# Altium PCB USBtoRS232-Panel_3x3.PcbDoc
Units mm, origin at the board's own origin, x right, y up, seen from the top; angles counter-clockwise.
Board outline 108 x 87 mm, 2 copper layers (Top Layer, Bottom Layer), stack 0.77 mm thick; 3 components, 0 nets, 6 pads, 0 vias.
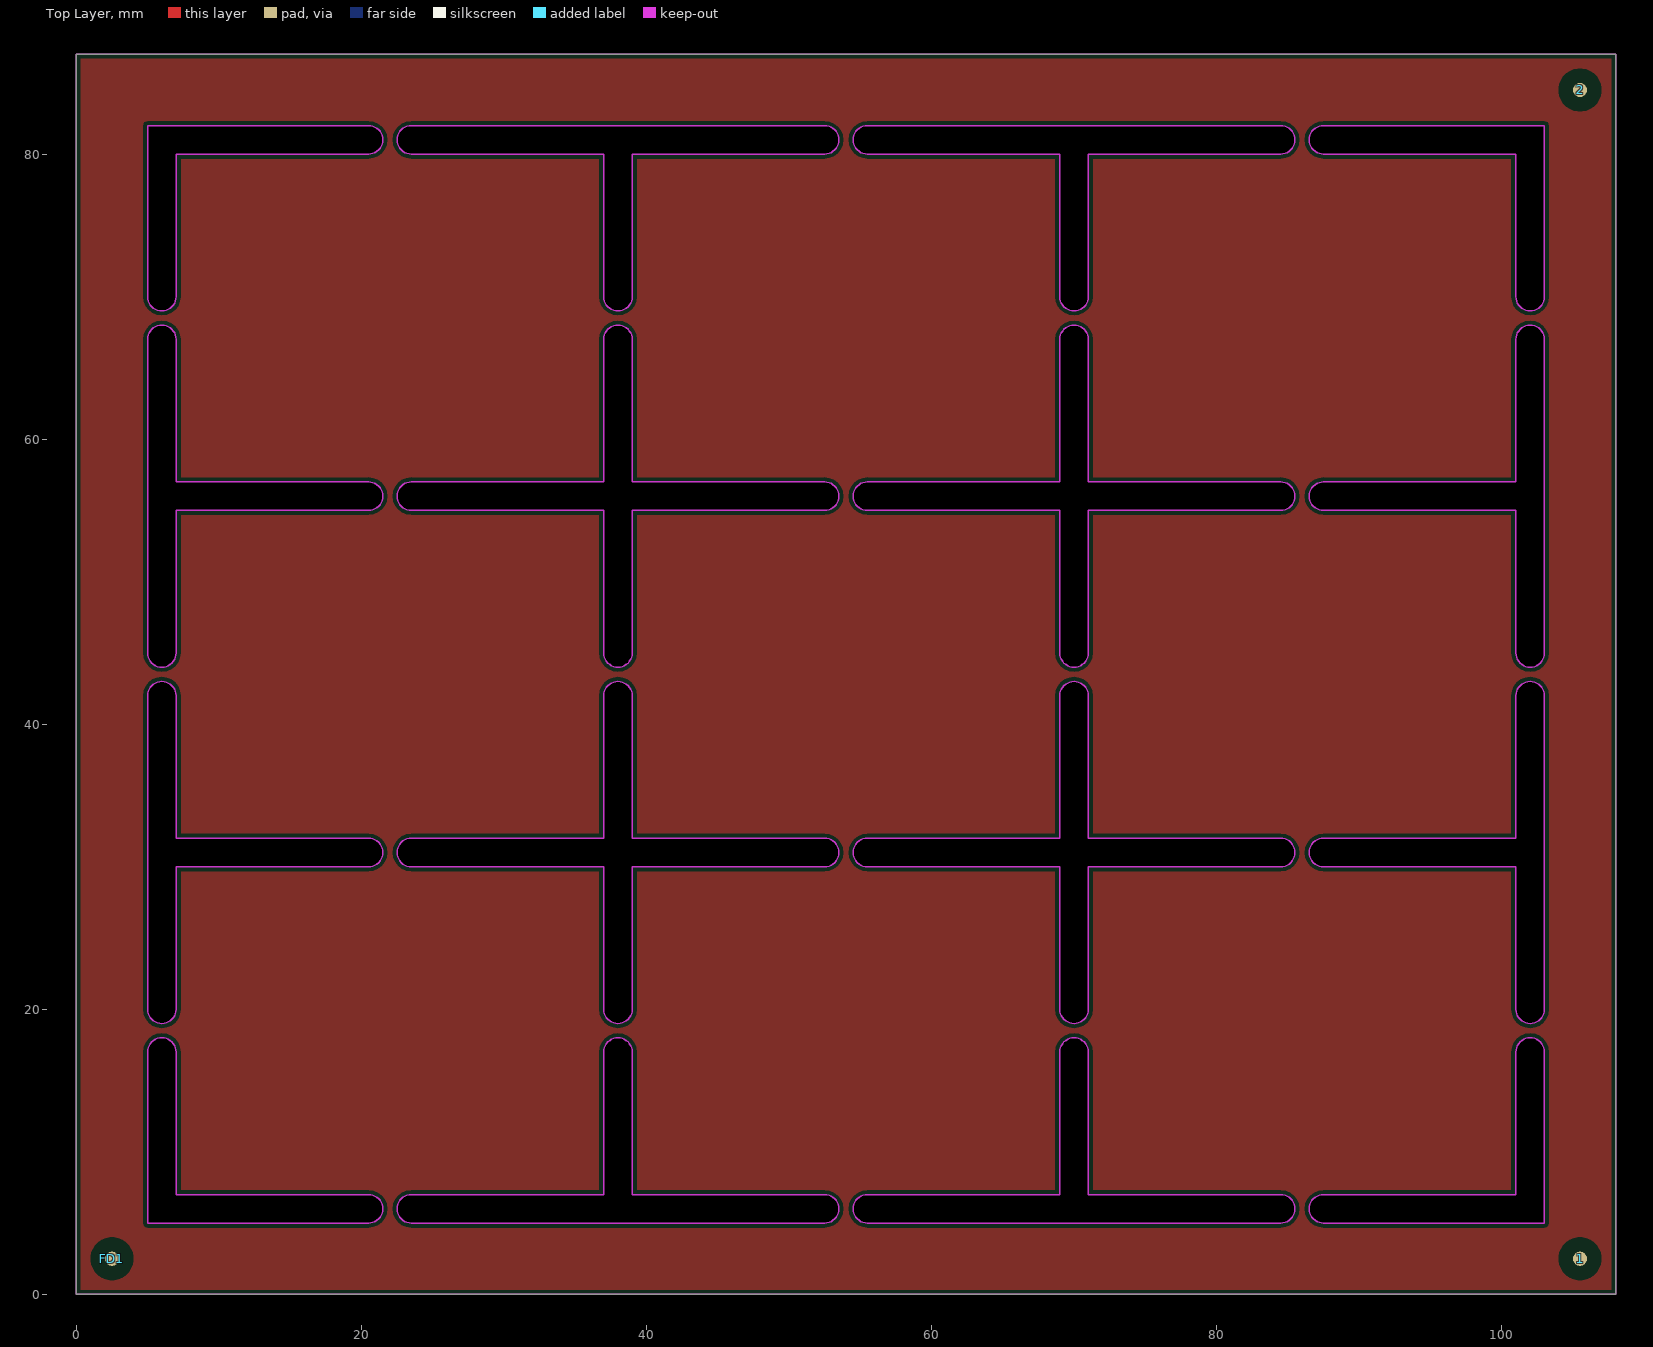
[diagram p0: Top Layer view]
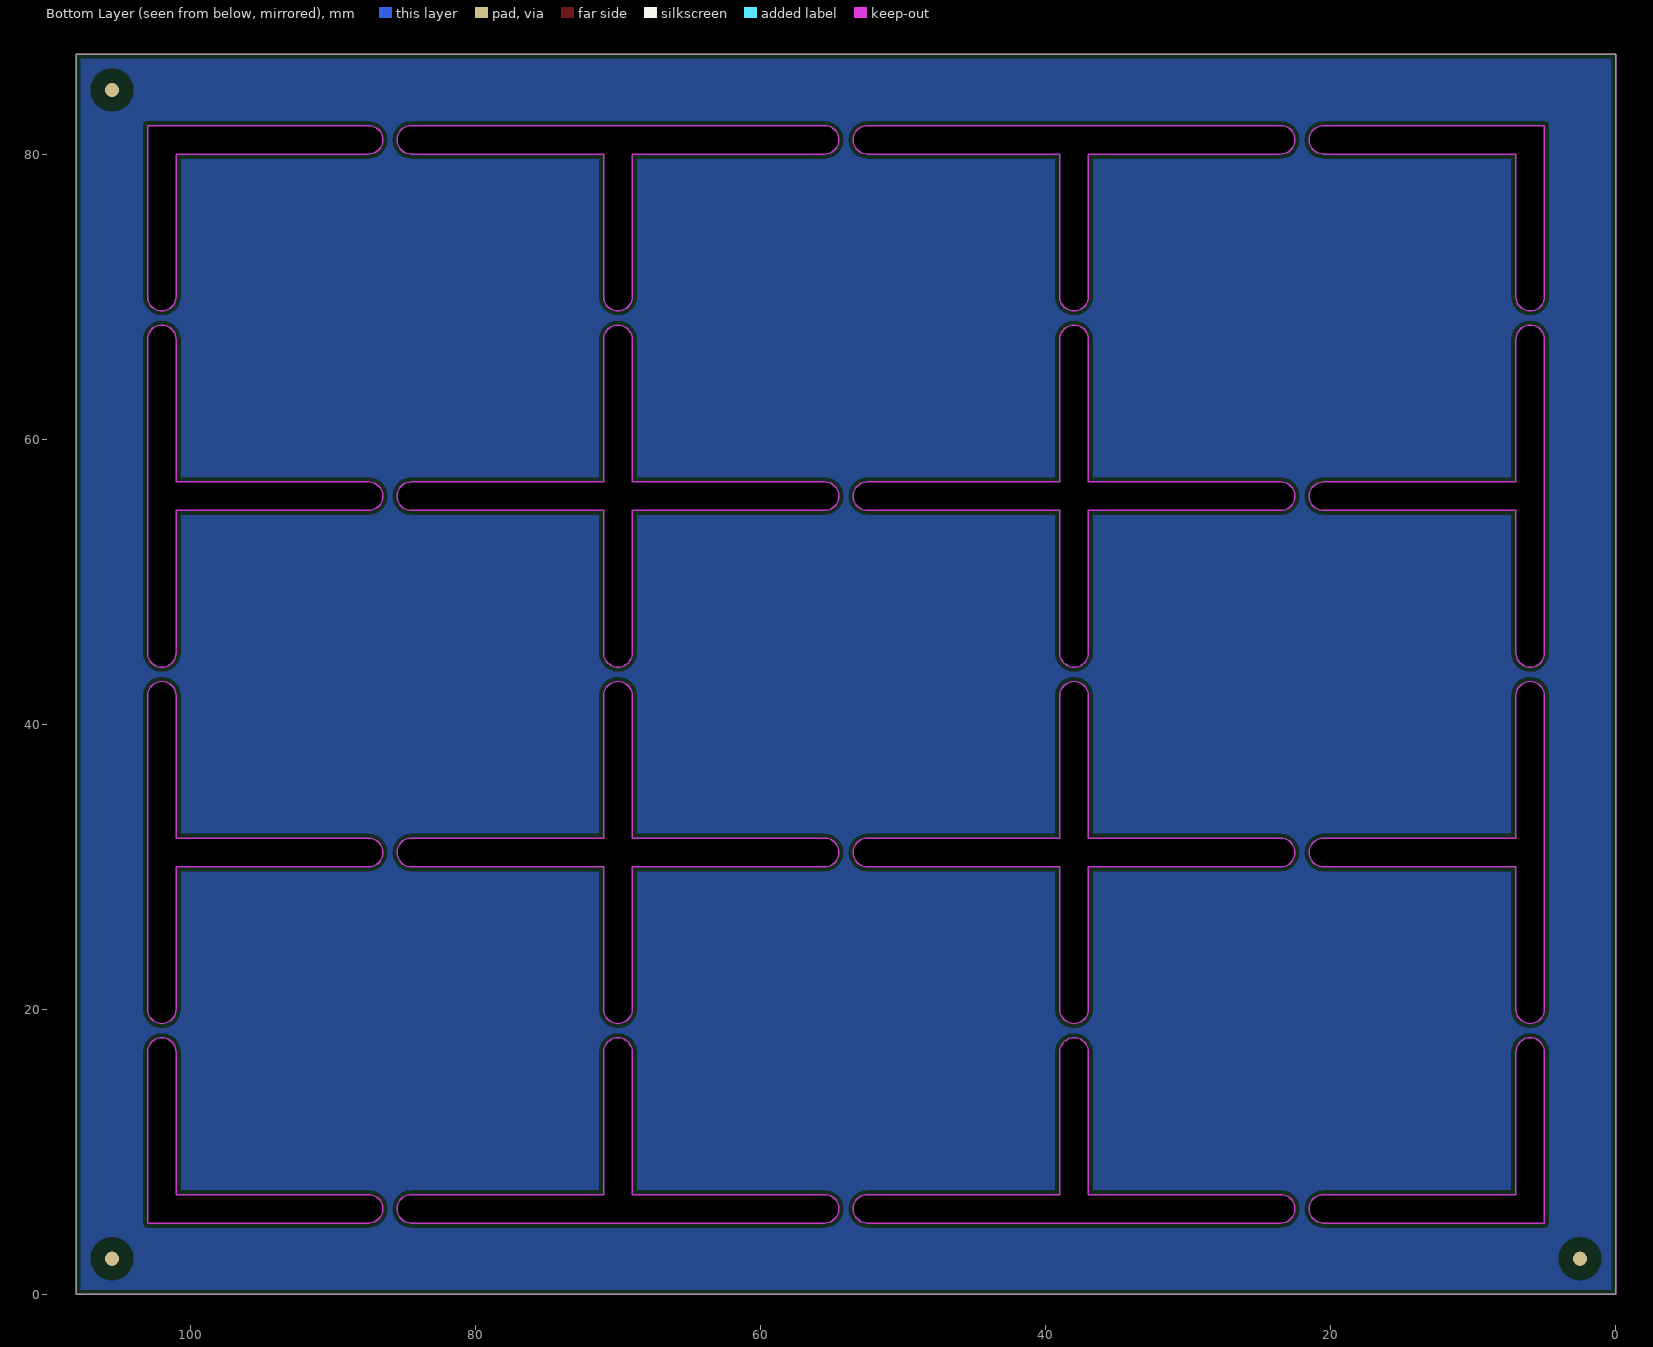
[diagram p1: Bottom Layer view, seen from below]

## Layer stack, top to bottom
Top Solder: solder mask 0.0102, Solder Resist, Dk 3.5
Top Layer: signal copper 0.035
Dielectric 1: dielectric 0.7, FR-4, Dk 4.8
Bottom Layer: signal copper 0.035
Bottom Solder: solder mask 0.0102, Solder Resist, Dk 3.5

## Board outline
0,0 0,87 108,87 108,0
cut-out: 103,5 103,17 ccw(c102,17) 102,18 ccw(c102,17) 101,17 101,7 87.5,7 ccw(c87.5,6) 86.5,6 ccw(c87.5,6) 87.5,5
cut-out: 102,19 ccw(c102,20) 103,20 103,42 ccw(c102,42) 102,43 ccw(c102,42) 101,42 101,32 87.5,32 ccw(c87.5,31) 86.5,31 ccw(c87.5,31) 87.5,30 101,30 101,20 ccw(c102,20)
cut-out: 102,44 ccw(c102,45) 103,45 103,67 ccw(c102,67) 102,68 ccw(c102,67) 101,67 101,57 87.5,57 ccw(c87.5,56) 86.5,56 ccw(c87.5,56) 87.5,55 101,55 101,45 ccw(c102,45)
cut-out: 102,69 ccw(c102,70) 103,70 103,82 87.5,82 ccw(c87.5,81) 86.5,81 ccw(c87.5,81) 87.5,80 101,80 101,70 ccw(c102,70)
cut-out: 84.5,80 71,80 71,70 cw(c70,70) 70,69 cw(c70,70) 69,70 69,80 55.5,80 cw(c55.5,81) 54.5,81 cw(c55.5,81) 55.5,82 84.5,82 cw(c84.5,81) 85.5,81 cw(c84.5,81)
cut-out: 84.5,55 71,55 71,45 cw(c70,45) 70,44 cw(c70,45) 69,45 69,55 55.5,55 cw(c55.5,56) 54.5,56 cw(c55.5,56) 55.5,57 69,57 69,67 cw(c70,67) 70,68 cw(c70,67) 71,67 71,57 84.5,57 cw(c84.5,56) 85.5,56 cw(c84.5,56)
cut-out: 84.5,30 71,30 71,20 cw(c70,20) 70,19 cw(c70,20) 69,20 69,30 55.5,30 cw(c55.5,31) 54.5,31 cw(c55.5,31) 55.5,32 69,32 69,42 cw(c70,42) 70,43 cw(c70,42) 71,42 71,32 84.5,32 cw(c84.5,31) 85.5,31 cw(c84.5,31)
cut-out: 85.5,6 ccw(c84.5,6) 84.5,7 71,7 71,17 ccw(c70,17) 70,18 ccw(c70,17) 69,17 69,7 55.5,7 ccw(c55.5,6) 54.5,6 ccw(c55.5,6) 55.5,5 84.5,5 ccw(c84.5,6)
cut-out: 22.5,6 cw(c23.5,6) 23.5,7 37,7 37,17 cw(c38,17) 38,18 cw(c38,17) 39,17 39,7 52.5,7 cw(c52.5,6) 53.5,6 cw(c52.5,6) 52.5,5 23.5,5 cw(c23.5,6)
cut-out: 23.5,30 37,30 37,20 ccw(c38,20) 38,19 ccw(c38,20) 39,20 39,30 52.5,30 ccw(c52.5,31) 53.5,31 ccw(c52.5,31) 52.5,32 39,32 39,42 ccw(c38,42) 38,43 ccw(c38,42) 37,42 37,32 23.5,32 ccw(c23.5,31) 22.5,31 ccw(c23.5,31)
cut-out: 23.5,55 37,55 37,45 ccw(c38,45) 38,44 ccw(c38,45) 39,45 39,55 52.5,55 ccw(c52.5,56) 53.5,56 ccw(c52.5,56) 52.5,57 39,57 39,67 ccw(c38,67) 38,68 ccw(c38,67) 37,67 37,57 23.5,57 ccw(c23.5,56) 22.5,56 ccw(c23.5,56)
cut-out: 23.5,80 37,80 37,70 ccw(c38,70) 38,69 ccw(c38,70) 39,70 39,80 52.5,80 ccw(c52.5,81) 53.5,81 ccw(c52.5,81) 52.5,82 23.5,82 ccw(c23.5,81) 22.5,81 ccw(c23.5,81)
cut-out: 6,69 cw(c6,70) 5,70 5,82 20.5,82 cw(c20.5,81) 21.5,81 cw(c20.5,81) 20.5,80 7,80 7,70 cw(c6,70)
cut-out: 6,44 cw(c6,45) 5,45 5,67 cw(c6,67) 6,68 cw(c6,67) 7,67 7,57 20.5,57 cw(c20.5,56) 21.5,56 cw(c20.5,56) 20.5,55 7,55 7,45 cw(c6,45)
cut-out: 6,19 cw(c6,20) 5,20 5,42 cw(c6,42) 6,43 cw(c6,42) 7,42 7,32 20.5,32 cw(c20.5,31) 21.5,31 cw(c20.5,31) 20.5,30 7,30 7,20 cw(c6,20)
cut-out: 5,5 5,17 cw(c6,17) 6,18 cw(c6,17) 7,17 7,7 20.5,7 cw(c20.5,6) 21.5,6 cw(c20.5,6) 20.5,5

## Design rules (kind name [scope] priority, off if disabled: settings)
Clearance [All] p1: gap=0.254 ignorepadtopadclearanceinfootprint=FALSE except(0: Arc-Hole Track-Hole SMDPad-Hole THPad-Hole Via-Hole Fill-Hole Poly-Hole Region-Hole Text-Hole)
PolygonConnect [All] p1: connectstyle=Relief reliefconductorwidth=0.254 reliefentries=4 polygonreliefangle="90 Angle" airgapwidth=0.254
RoutingVias [All] p1: holewidth=0.711 width=1.27 viastyle="Through Hole" minholewidth=0.711 minwidth=1.27 maxholewidth=0.711 maxwidth=1.27
SolderMaskExpansion [All] p1: expansion=0.102
Width [All] p1: maxlimit=0.254 minlimit=0.254 preferedwidth=0.254
30 further rules are at their usual default settings.

## Components (designator, comment, footprint, x,y, rotation, side; value= is the part's Value field where it differs from the comment)
1 "" Fiducial_T-B 105.5,2.5 r180 top (schematic designator FD1)
2 "" Fiducial_T-B 105.5,84.5 r180 top (schematic designator FD1)
FD1 "" Fiducial_T-B 2.5,2.5 r0 top

## Footprints (in the part's own frame and the unit in brackets; to place one, negate y for a bottom-side part, rotate by r counter-clockwise, add the part's x,y. Pads: shape width x height; smd on the part's side, far side on the other; paste and mask are expansions set on the pad)
Fiducial_T-B [mm]
  round 1 smd mask+1: 1(0,0)
  round 1 smd far side mask+1: 1(0,0)
  Top Layer pour cut-out: 0,1.5 -0.574,1.386 -1.061,1.061 -1.386,0.574 -1.5,0 -1.5,0 -1.386,-0.574 -1.061,-1.061 -0.574,-1.386 0,-1.5 0,-1.5 0.574,-1.386 1.061,-1.061 1.386,-0.574 1.5,0 1.5,0 1.386,0.574 1.061,1.061 0.574,1.386 0,1.5
  Bottom Layer pour cut-out: 0,1.5 -0.574,1.386 -1.061,1.061 -1.386,0.574 -1.5,0 -1.5,0 -1.386,-0.574 -1.061,-1.061 -0.574,-1.386 0,-1.5 0,-1.5 0.574,-1.386 1.061,-1.061 1.386,-0.574 1.5,0 1.5,0 1.386,0.574 1.061,1.061 0.574,1.386 0,1.5

## Part data
1 2 FD1: library part 3, "Fiducial"

## Nets (pads, with @x,y where several pads share a name; then routed paths per layer and width w, separated by ;. In a path a pad name is that pad's centre, name@x,y a point inside that pad or via, vN(x,y) a via of type N, cw(c..) or ccw(c..) an arc to the next point about the centre after c; other vN are vias at no path point)
pads on no net: 1.1 2.1 FD1.1

## Polygon pours and split planes (outlines as drawn)
no net on Top Layer (solid, pour order 0): 0,87 0,0 108,0 108,87
no net on Bottom Layer (solid, pour order 2): 0,87 108,87 108,0 0,0

## Keep-outs
Keep-Out Layer:
  lines w0.1: 0,0 108,0 108,87 0,87 0,0 ; 5,5 5,17 cw(c6,17) 6,18 cw(c6,17) 7,17 7,7 20.5,7 cw(c20.5,6) 21.5,6 cw(c20.5,6) 20.5,5 5,5 ; 5,20 ccw(c6,20) 6,19 ccw(c6,20) 7,20 7,30 20.5,30 ccw(c20.5,31) 21.5,31 ccw(c20.5,31) 20.5,32 7,32 7,42 ccw(c6,42) 6,43 ccw(c6,42) 5,42 5,20 ; 5,45 ccw(c6,45) 6,44 ccw(c6,45) 7,45 7,55 20.5,55 ccw(c20.5,56) 21.5,56 ccw(c20.5,56) 20.5,57 7,57 7,67 ccw(c6,67) 6,68 ccw(c6,67) 5,67 5,45 ; 5,70 ccw(c6,70) 6,69 ccw(c6,70) 7,70 7,80 20.5,80 ccw(c20.5,81) 21.5,81 ccw(c20.5,81) 20.5,82 5,82 5,70 ; 22.5,6 cw(c23.5,6) 23.5,7 37,7 37,17 cw(c38,17) 38,18 cw(c38,17) 39,17 39,7 52.5,7 cw(c52.5,6) 53.5,6 cw(c52.5,6) 52.5,5 37.76,5 23.5,5 cw(c23.5,6) 22.5,6 ; 22.5,31 cw(c23.5,31) 23.5,32 37,32 37,42 cw(c38,42) 38,43 cw(c38,42) 39,42 39,32 52.5,32 cw(c52.5,31) 53.5,31 cw(c52.5,31) 52.5,30 39,30 39,20 cw(c38,20) 38,19 cw(c38,20) 37,20 37,30 23.5,30 cw(c23.5,31) 22.5,31 ; 22.5,56 ccw(c23.5,56) 23.5,55 37,55 37,45 ccw(c38,45) 38,44 ccw(c38,45) 39,45 39,55 52.5,55 ccw(c52.5,56) 53.5,56 ccw(c52.5,56) 52.5,57 39,57 39,67 ccw(c38,67) 38,68 ccw(c38,67) 37,67 37,57 23.5,57 ccw(c23.5,56) 22.5,56 ; 22.5,81 cw(c23.5,81) 23.5,82 37.76,82 52.5,82 cw(c52.5,81) 53.5,81 cw(c52.5,81) 52.5,80 39,80 39,70 cw(c38,70) 38,69 cw(c38,70) 37,70 37,80 23.5,80 cw(c23.5,81) 22.5,81 ; 54.5,6 cw(c55.5,6) 55.5,7 69,7 69,17 cw(c70,17) 70,18 cw(c70,17) 71,17 71,7 84.5,7 cw(c84.5,6) 85.5,6 cw(c84.5,6) 84.5,5 70.24,5 55.5,5 cw(c55.5,6) 54.5,6 ; 54.5,31 ccw(c55.5,31) 55.5,30 69,30 69,20 ccw(c70,20) 70,19 ccw(c70,20) 71,20 71,30 84.5,30 ccw(c84.5,31) 85.5,31 ccw(c84.5,31) 84.5,32 71,32 71,42 ccw(c70,42) 70,43 ccw(c70,42) 69,42 69,32 55.5,32 ccw(c55.5,31) 54.5,31 ; 54.5,56 cw(c55.5,56) 55.5,57 69,57 69,67 cw(c70,67) 70,68 cw(c70,67) 71,67 71,57 84.5,57 cw(c84.5,56) 85.5,56 cw(c84.5,56) 84.5,55 71,55 71,45 cw(c70,45) 70,44 cw(c70,45) 69,45 69,55 55.5,55 cw(c55.5,56) 54.5,56 ; 54.5,81 ccw(c55.5,81) 55.5,80 69,80 69,70 ccw(c70,70) 70,69 ccw(c70,70) 71,70 71,80 84.5,80 ccw(c84.5,81) 85.5,81 ccw(c84.5,81) 84.5,82 70.24,82 55.5,82 ccw(c55.5,81) 54.5,81 ; 86.5,6 ccw(c87.5,6) 87.5,5 103,5 103,17 ccw(c102,17) 102,18 ccw(c102,17) 101,17 101,7 87.5,7 ccw(c87.5,6) 86.5,6 ; 86.5,31 cw(c87.5,31) 87.5,32 101,32 101,42 cw(c102,42) 102,43 cw(c102,42) 103,42 103,20 cw(c102,20) 102,19 cw(c102,20) 101,20 101,30 87.5,30 cw(c87.5,31) 86.5,31 ; 86.5,56 cw(c87.5,56) 87.5,57 101,57 101,67 cw(c102,67) 102,68 cw(c102,67) 103,67 103,45 cw(c102,45) 102,44 cw(c102,45) 101,45 101,55 87.5,55 cw(c87.5,56) 86.5,56 ; 86.5,81 ccw(c87.5,81) 87.5,80 101,80 101,70 ccw(c102,70) 102,69 ccw(c102,70) 103,70 103,82 87.5,82 ccw(c87.5,81) 86.5,81

## Silkscreen, mask and mechanical layers (free items; w line width, h text height)
Drill Drawing:
  drawing of 197 lines, arcs and shapes, not listed
  text "Layer" at 118.459,50.574 h1.52
  text "Name" at 127.304,50.574 h1.52
  text "Material" at 146.728,50.574 h1.52
  text "Thickness" at 163.554,50.574 h1.52
  text "Constant" at 176.688,50.574 h1.52
  text "Board Layer Stack" at 189.204,50.574 h1.52
  text "Top Overlay" at 127.304,47.526 h1.52
  text "Top Solder" at 127.304,44.478 h1.52
  text "Solder Resist" at 146.728,44.478 h1.52
  text "0,010mm" at 163.554,44.478 h1.52
  text "3,5" at 176.688,44.478 h1.52
  text "1" at 118.459,41.43 h1.52
  text "Top Layer" at 127.304,41.43 h1.52
  text "Copper" at 146.728,41.43 h1.52
  text "0,035mm" at 163.554,41.43 h1.52
  text "Dielectric 1" at 127.304,38.382 h1.52
  text "FR-4" at 146.728,38.382 h1.52
  text "0,700mm" at 163.554,38.382 h1.52
  text "4,8" at 176.688,38.382 h1.52
  text "2" at 118.459,35.334 h1.52
  text "Bottom Layer" at 127.304,35.334 h1.52
  text "Copper" at 146.728,35.334 h1.52
  text "0,035mm" at 163.554,35.334 h1.52
  text "Bottom Solder" at 127.304,32.286 h1.52
  text "Solder Resist" at 146.728,32.286 h1.52
  text "0,010mm" at 163.554,32.286 h1.52
  text "3,5" at 176.688,32.286 h1.52
  text "Bottom Overlay" at 127.304,29.238 h1.52
  text "Symbol" at 119.397,19.88 h1.83
  text "Count" at 131.02,19.88 h1.83
  text "Hole Size" at 144.509,19.88 h1.83
  text "Plated" at 168.641,19.88 h1.83
  text "Hole Type" at 178.723,19.88 h1.83
  text "Drill Layer Pair" at 193.689,19.88 h1.83
  text "Via/Pad" at 224.997,19.88 h1.83
  text "Pad Shape" at 237.473,19.88 h1.83
  text "Template" at 253.78,19.88 h1.83
  text "963" at 131.02,16.07 h1.52
  text "0,300mm (11,81mil)" at 144.509,16.07 h1.52
  text "PTH" at 168.641,16.07 h1.52
  text "Round" at 178.723,16.07 h1.52
  text "Top Layer - Bottom Layer" at 193.689,16.07 h1.52
  text "Via" at 224.997,16.07 h1.52
  text "Rounded" at 237.473,16.07 h1.52
  text "v60h30m0mx0" at 253.78,16.07 h1.52
  text "18" at 131.02,12.26 h1.52
  text "0,700mm (27,56mil)" at 144.509,12.26 h1.52
  text "PTH" at 168.641,12.26 h1.52
  text "Round" at 178.723,12.26 h1.52
  text "Top Layer - Bottom Layer" at 193.689,12.26 h1.52
  text "Pad" at 224.997,12.26 h1.52
  text "Rounded" at 237.473,12.26 h1.52
  text "c70h70m0mx0" at 253.78,12.26 h1.52
  text "270" at 131.02,8.45 h1.52
  text "1,100mm (43,31mil)" at 144.509,8.45 h1.52
  text "PTH" at 168.641,8.45 h1.52
  text "Round" at 178.723,8.45 h1.52
  text "Top Layer - Bottom Layer" at 193.689,8.45 h1.52
  text "Pad" at 224.997,8.45 h1.52
  text "(Mixed)" at 237.473,8.45 h1.52
  text "(Mixed)" at 253.78,8.45 h1.52
  text "1251 Total" at 131.02,4.64 h1.52

## Dimensions
0,0 to 0,87 on Drill Drawing
0,0 to 108,0 on Drill Drawing

## Panel: embedded boards
"USBtoRS232.PcbDoc" at 7,7, 3 rows x 3 columns, spacing 25 x 32, rotation 0